# EAGLE board Qwiic GPS-RTK - ublox NEO-M8P-MiddleJig (EAGLE 9.2.0)
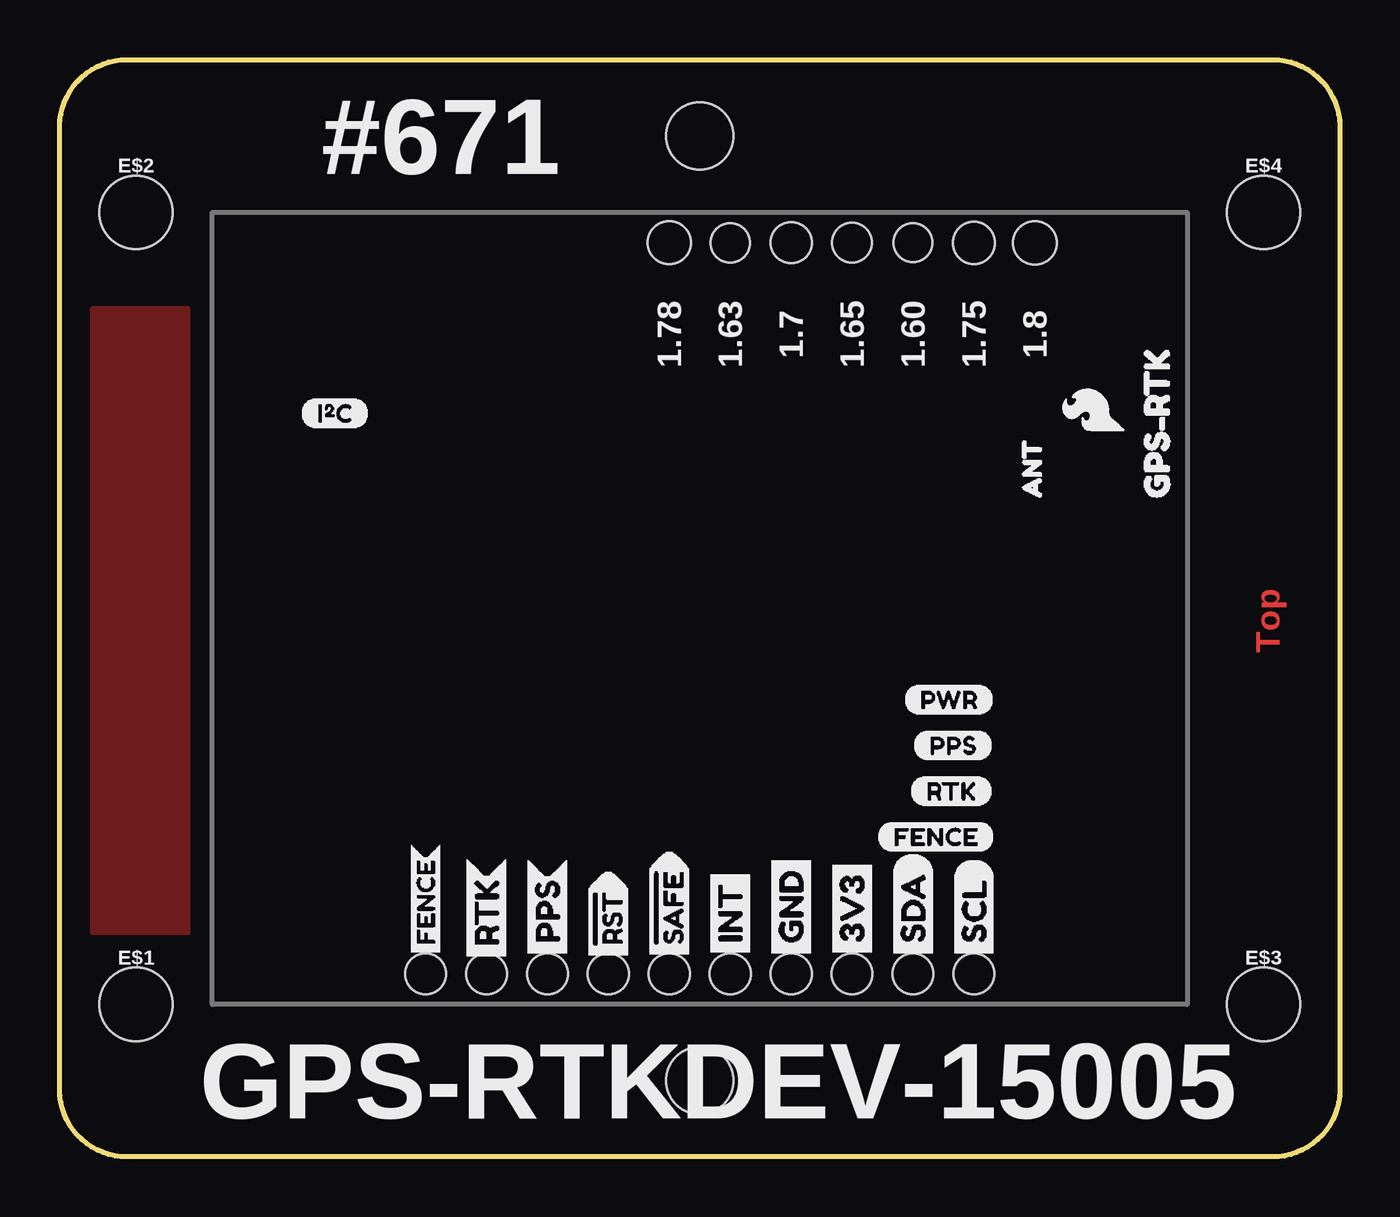
[diagram p0: board, top side]
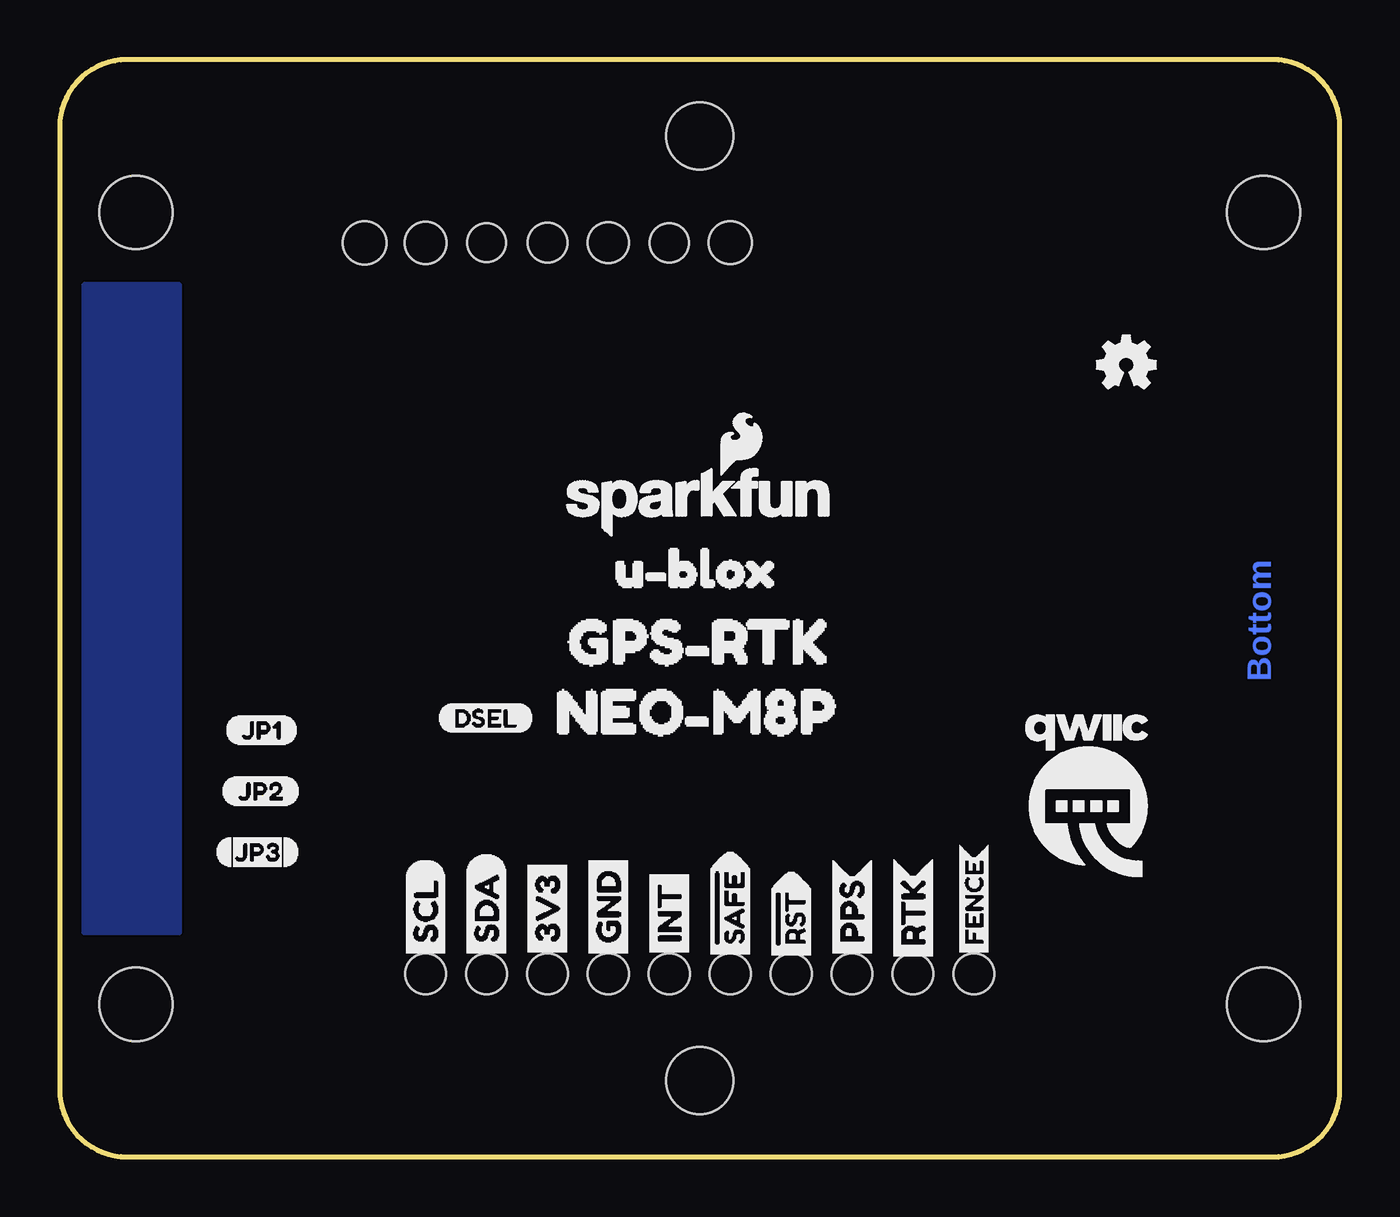
[diagram p1: board, bottom side, seen from below]

Size 53.34 x 45.72 mm. Coordinates in mm from the lower left corner, seen from the top.
Outline: 0,43.18 arc-80 2.54,45.72 50.8,45.72 arc-80 53.34,43.18 53.34,2.54 arc-80 50.8,0 2.54,0 arc-80 0,2.54 0,43.18
Copper layers (1*16): Top 0.035mm / dielectric 1.5mm / Bottom 0.035mm
Design rules "SparkFun-2-layer-PCBWay-LIMIT": minimum track width 6mil, minimum drill 0.3mm, track to track 6mil, track to pad 6mil, pad to pad 6mil, via to via 6mil, smd to smd 6mil, copper to edge 6mil, drill to drill 6mil, minimum pad ring 6mil, minimum via ring 6mil, stop-mask expansion 4mil, vias tented up to drill 25mil, thermal gap 10mil
Net classes: 1 vcc: width 0.152 mm; 2 3.3V: width 0.508 mm
Holes 1.78 mm at 25.4,38.1
Holes 1.63 mm at 27.94,38.1
Holes 1.7 mm at 30.48,38.1 30.48,7.62 33.02,7.62 35.56,7.62 38.1,7.62 27.94,7.62 25.4,7.62 22.86,7.62 20.32,7.62 17.78,7.62 15.24,7.62
Holes 1.65 mm at 33.02,38.1
Holes 1.6 mm at 35.56,38.1
Holes 1.75 mm at 38.1,38.1
Holes 1.8 mm at 40.64,38.1

## Footprints (pad centres in the part's own frame; a part is rotated, then mirrored left to right if it is on the bottom)
STAND-OFF-TIGHT = hole 3.048: 0,0
NUBBIN_LOCKER = hole 2.794: 0,0

## Placement (x,y rotation side)
E$1  [STAND-OFF-TIGHT]  3.17,6.35 0 top
E$2  [STAND-OFF-TIGHT]  3.17,39.37 0 top
E$3  [STAND-OFF-TIGHT]  50.16,6.35 0 top
E$4  [STAND-OFF-TIGHT]  50.16,39.37 0 top
E$5  [NUBBIN_LOCKER]  26.67,3.17 0 top
E$6  [NUBBIN_LOCKER]  26.67,42.55 0 top
FRAME1  FRAME-LETTER  [CREATIVE_COMMONS]  60.96,-11.43 0 top  (outside the outline)
LOGO1  OSHW-LOGOMINI  [OSHW-LOGO-MINI]  8.89,33.02 0 bottom
LOGO2  SFE_LOGO_NAME_FLAME.1_INCH  [SFE_LOGO_NAME_FLAME_.1]  32.64,25.78 0 bottom
U$1  [SDA-[)]  35.56,8 90 top
U$3  [SCL-[)]  38.1,8 90 top
U$4  [SDA-[)]  35.56,8 90 bottom
U$5  [SCL-[)]  38.1,8 90 bottom
U$6  [3V3-04]  33.02,8 90 top
U$7  [3V3-04]  33.02,8 90 bottom
U$8  [GND-04]  30.48,8 90 top
U$9  [GND-04]  30.48,8 90 bottom
U$10  [I_SUPER2_C-()-03]  10.03,30.99 0 top
U$11  [FENCE2]  34.04,13.34 0 top
U$12  [JP20]  46.61,15.24 0 bottom
U$13  [RTK1]  35.43,15.24 0 top
U$14  [FENCE0]  15.24,8.13 90 top
U$15  [INT8]  27.94,8 90 top
U$16  [INT8]  27.94,8 90 bottom
U$17  [FENCE0]  15.24,8.13 90 bottom
U$18  [PWR-()-03]  35.18,19.05 0 top
U$21  [GPS#RTK0]  45.72,26.54 90 top
U$22  [U#BLOX3]  31.62,24.51 0 bottom
U$25  [JP10]  46.48,17.78 0 bottom
U$27  [DSEL0]  37.59,18.29 0 bottom
U$28  [RTK1]  17.78,7.87 90 bottom
U$29  [RTK1]  17.78,7.87 90 top
U$30  [QWIIC-LOGO-MEDIUM]  10.54,15.11 0 bottom
U$32  [JP32]  46.86,12.7 0 bottom
U$33  [SFE_LOGO_FLAME_.1]  44.7,29.97 90 top
U$35  [#RST3]  22.86,7.75 90 top
U$36  [#RST3]  22.86,7.75 90 bottom
U$39  [#SAFE1]  25.4,7.75 90 top
U$40  [#SAFE1]  25.4,7.75 90 bottom
U$43  [PPS5]  20.32,8 90 top
U$44  [PPS5]  20.32,8 90 bottom
U$52  [PPS0]  35.56,17.14 0 top
U$53  [NEO#M8P3]  34.29,18.54 0 bottom
U$54  [GPS#RTK1]  33.78,21.46 0 bottom
U$55  [ANT0]  40.51,26.8 90 top

## Library data of the parts
E$1-E$6 = SparkFun-Hardware
FRAME1 LOGO1 LOGO2 U$33 = SparkFun-Aesthetics
U$1 U$3-U$10 U$18 U$30 = Labels
U$11-U$13 = buzzard_labels
U$14 U$17 U$28 U$29 = buzzard_labels (1)
U$15 U$16 U$22 U$25 U$32 = buzzard_labels (5)
U$21 = buzzard_labels (3)
U$27 = buzzard_labels (6)
U$35 U$36 U$39 U$40 U$43 U$44 U$53 = buzzard_labels (7)
U$52 = buzzard_labels (33)
U$54 = buzzard_labels (8)
U$55 = buzzard_labels (9)

## Tracks (layer width: path | path; a pad name or v marks a point on that pad's centre or on a via)
GND
  pour Top (isolate 0.305): 1.35,35.35 1.35,9.35 5.35,9.35 5.35,35.35
SHLD
  pour Bottom (isolate 0.305): 48.35,36.35 52.35,36.35 52.35,9.35 48.35,9.35

## Text on the board
Top: Top
Bottom: Bottom
tPlace: #671 | 1.78 | 1.63 | 1.7 | 1.65 | 1.60 | 1.75 | 1.8 | GPS-RTK | DEV-15005
Measures: Measurements in inches